# Altium PCB Analog_project.PcbDoc
Units mm, origin at the board's own origin, x right, y up, seen from the top; angles counter-clockwise.
Board outline 85 x 55 mm, 4 copper layers (Top Layer, Layer 1, Layer 2, Bottom Layer), stack 1.483 mm thick; 39 components, 28 nets, 155 pads, 46 vias.
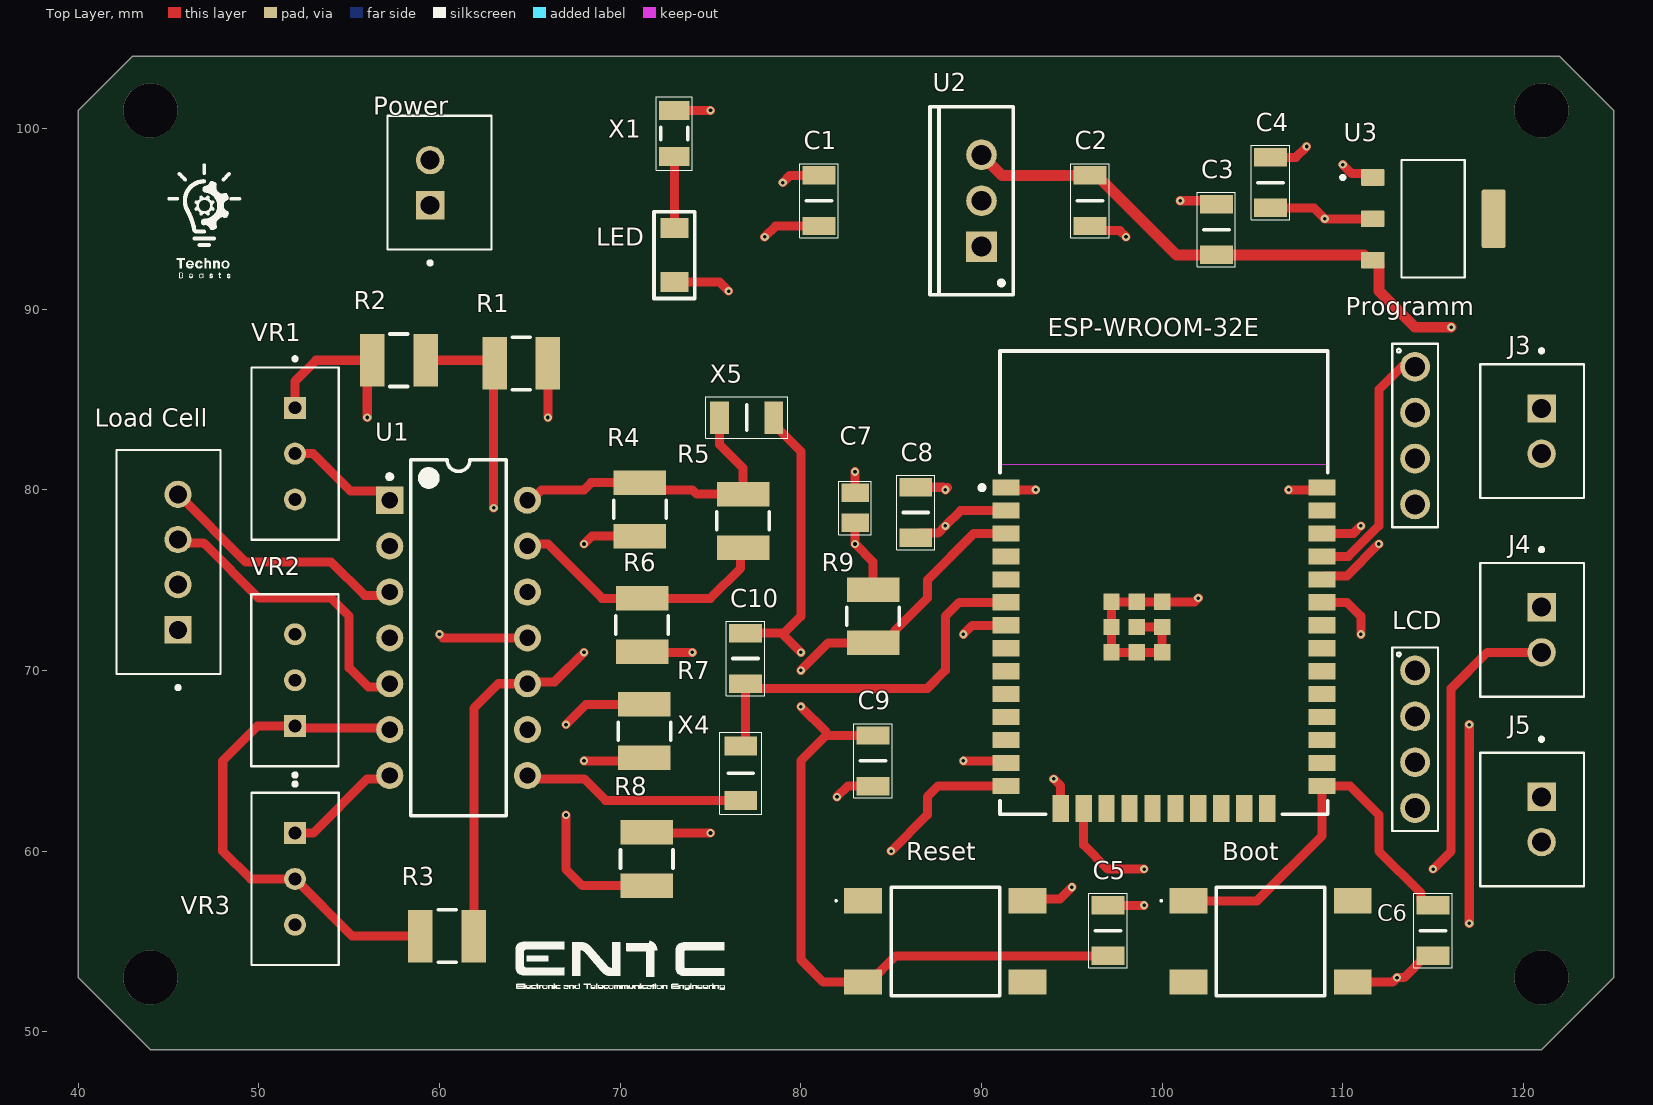
[diagram p0: Top Layer view]
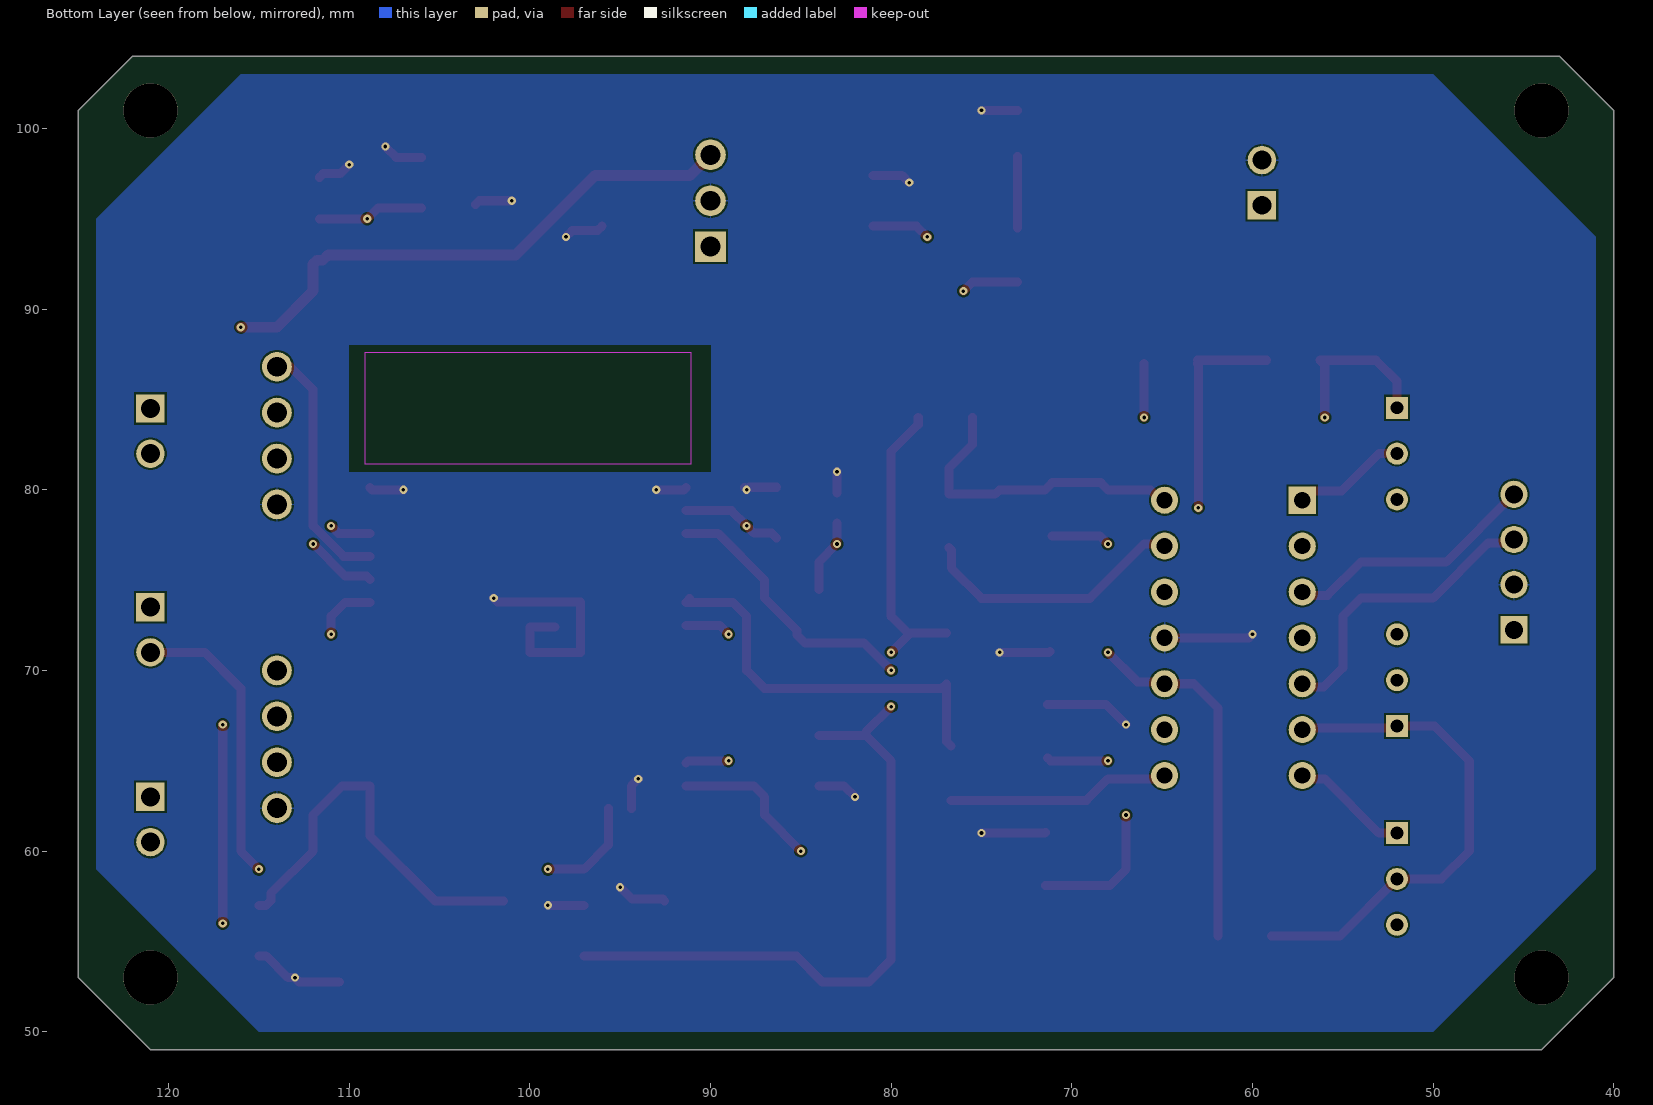
[diagram p1: Bottom Layer view, seen from below]
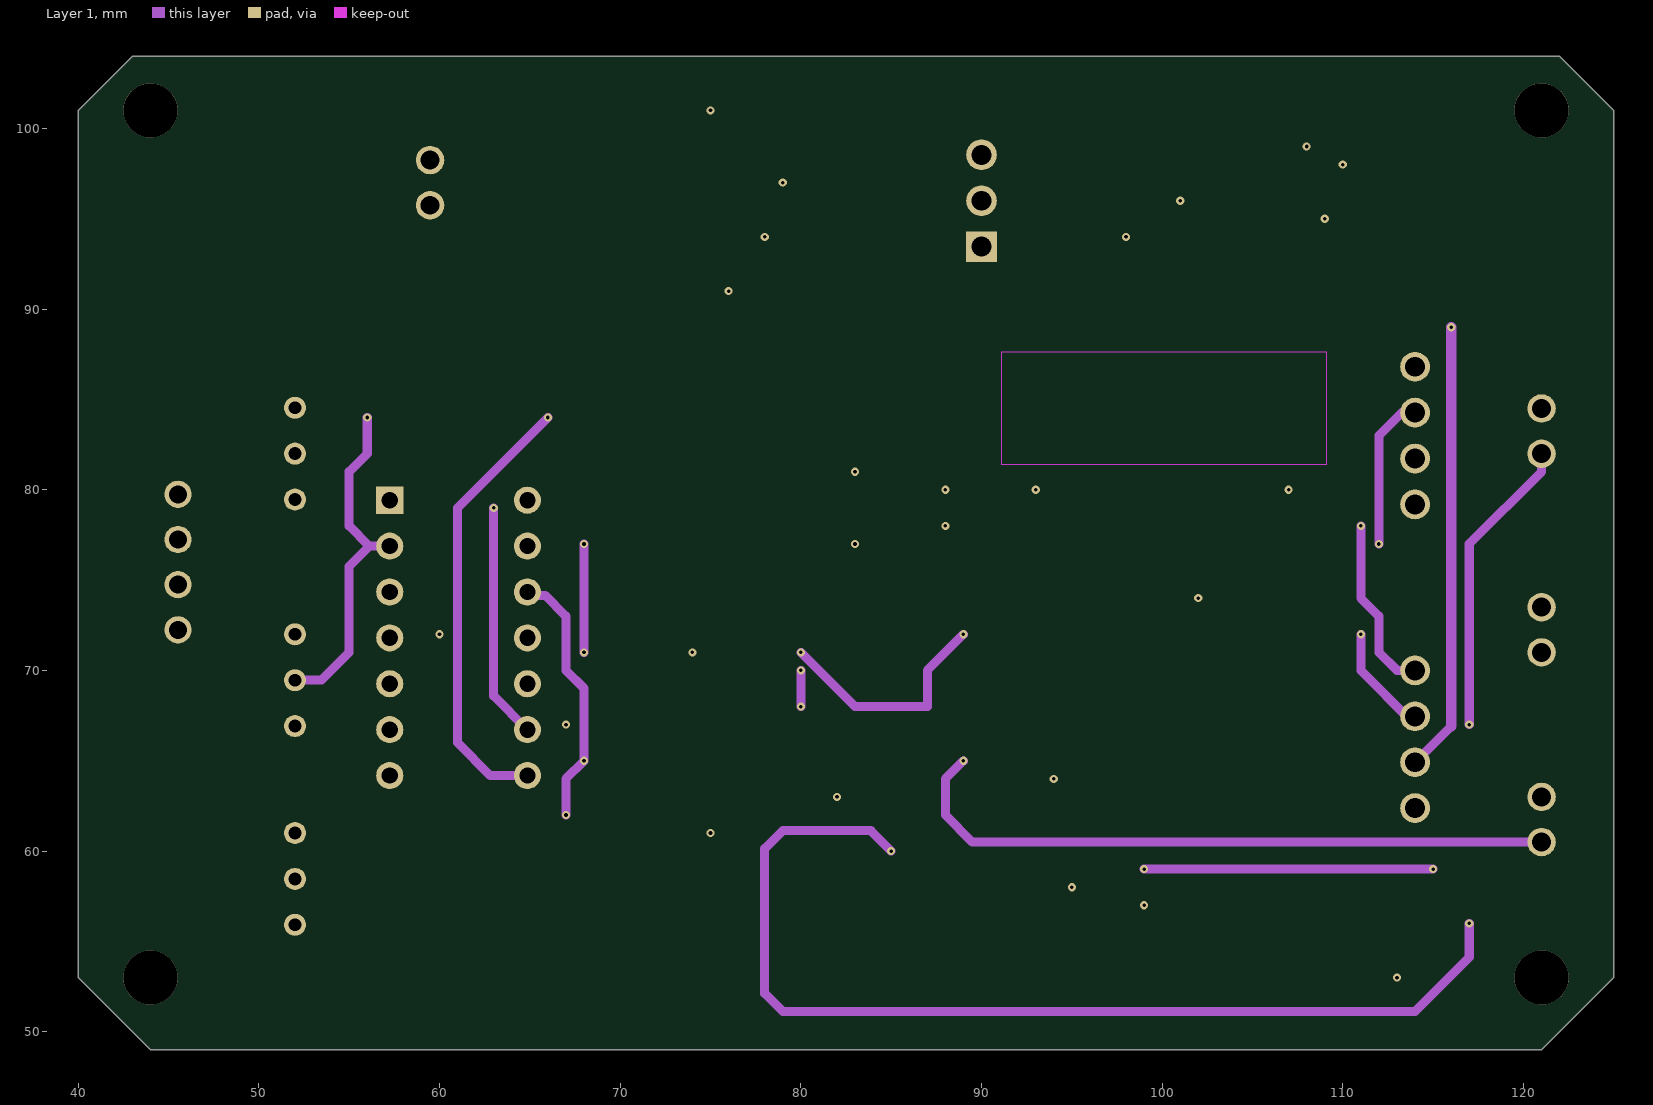
[diagram p2: Layer 1]
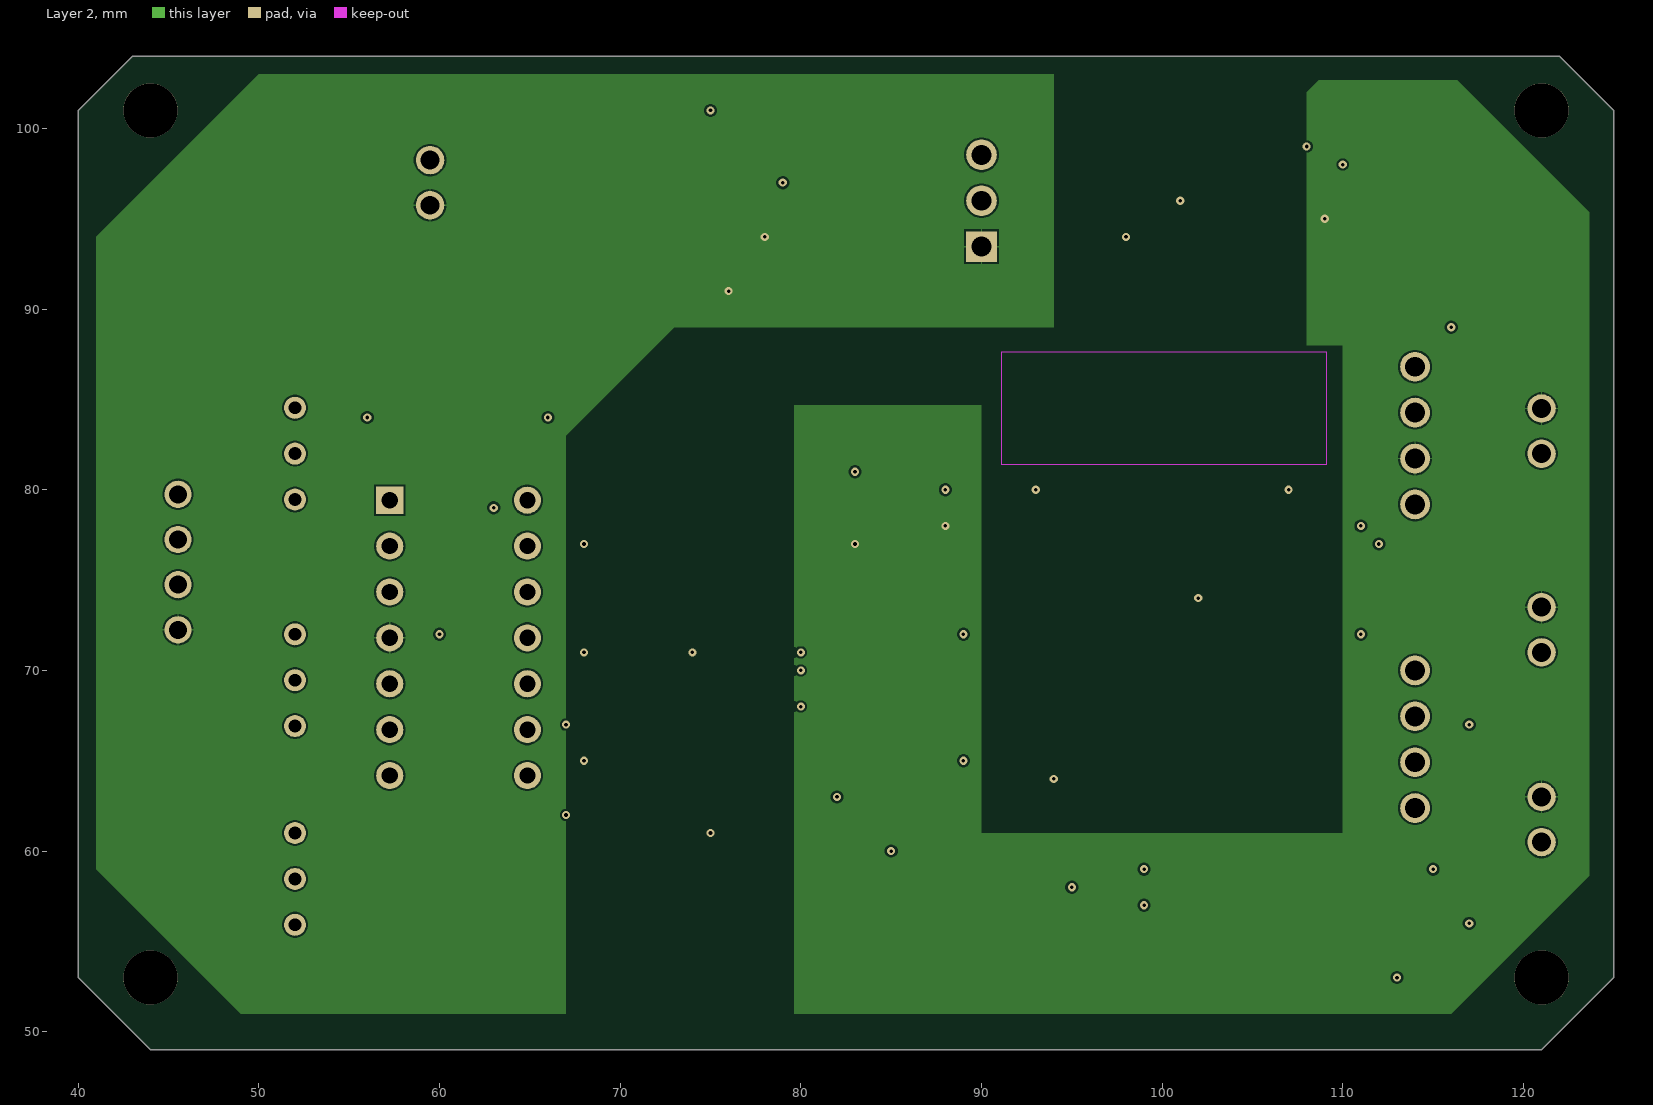
[diagram p3: Layer 2]
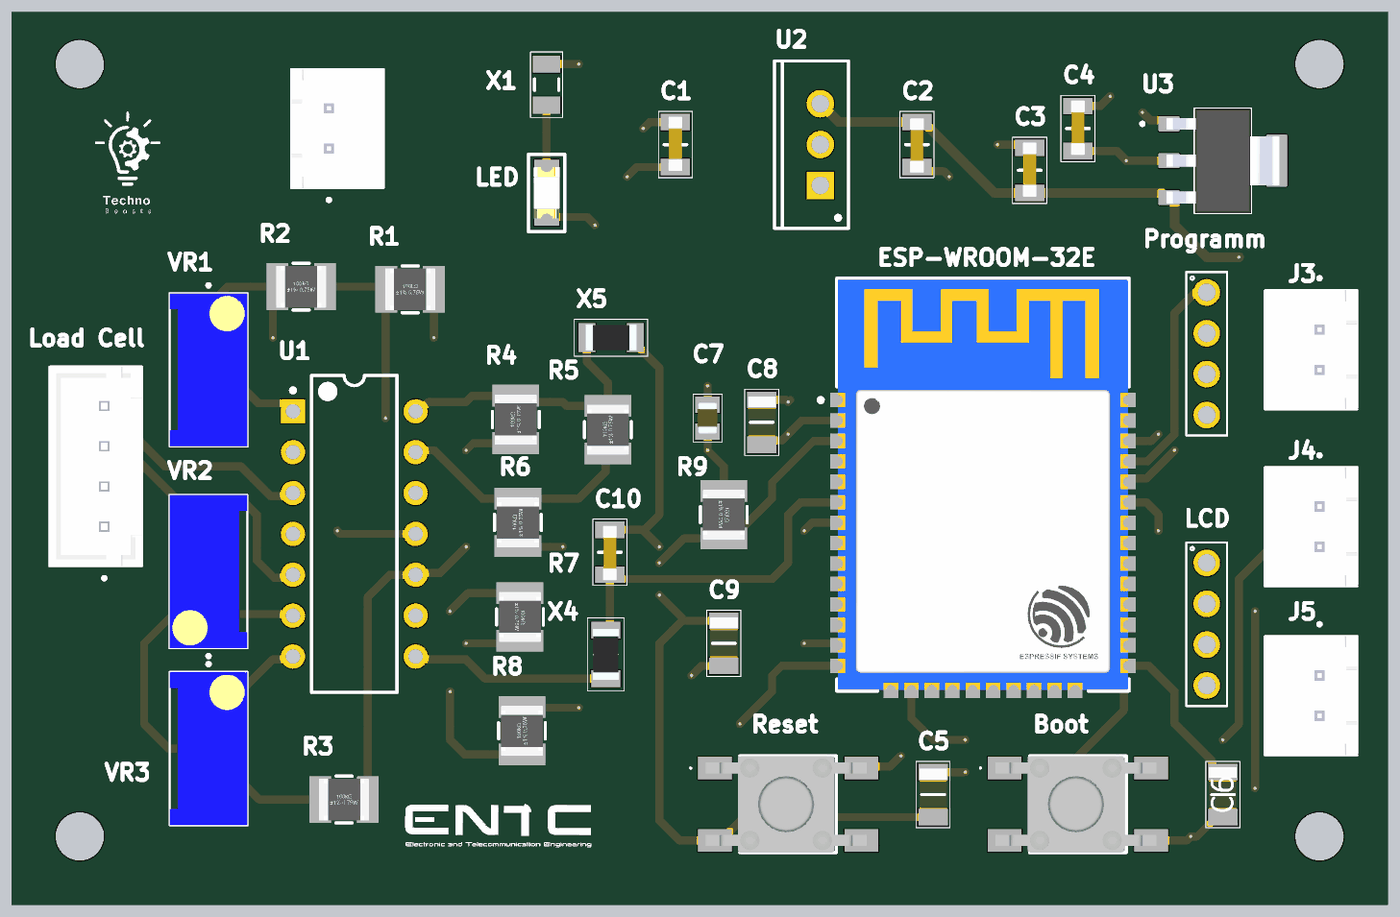
[diagram p4: 3D render of the assembled board from above, using the file's embedded part models]

## Layer stack, top to bottom
Top Solder: solder mask 0.0102, Solder Resist, Dk 3.5
Top Layer: signal copper 0.0356
Dielectric 2: prepreg 0.0711, PP-006, Dk 4.29
Layer 1: signal copper 0.035
Dielectric 1: dielectric 1.2, FR-4, Dk 4.8
Layer 2: signal copper 0.035
Dielectric 3: prepreg 0.0711, PP-006, Dk 4.29
Bottom Layer: signal copper 0.0356
Bottom Solder: solder mask 0.0102, Solder Resist, Dk 3.5

## Board outline
40,53 40,101 43,104 122,104 125,101 125,53 122.125,50.125 121,49 44,49

## Design rules (kind name [scope] priority, off if disabled: settings)
BoardOutlineClearance [All] p1: gap=0.2 ignorepadtopadclearanceinfootprint=FALSE
Clearance [All] p1: gap=0.102 ignorepadtopadclearanceinfootprint=FALSE except(0.127: Arc-Via Track-Via SMDPad-Via THPad-Via Via-Via Via-Fill Via-Poly Via-Region Via-Text; 0.25: Arc-Hole Track-Hole SMDPad-Hole THPad-Hole Via-Hole Fill-Hole Poly-Hole Region-Hole Text-Hole)
ComponentClearance [All] p1: gap=0.102 collisioncheckmode=3 verticalgap=0.102 showdistances=TRUE
DiffPairsRouting [All] p1: maxlimit=0.102 minlimit=0.102 mostfreqgap=0.102 toplayer_minwidth=0.102 toplayer_maxwidth=1816.048 toplayer_prefwidth=0.102 midlayer1_minwidth=0.102 midlayer1_maxwidth=1816.048 midlayer1_prefwidth=0.102 midlayer2_minwidth=0.102 midlayer2_maxwidth=1816.048 midlayer2_prefwidth=0.102 bottomlayer_minwidth=0.102 bottomlayer_maxwidth=1816.048 bottomlayer_prefwidth=0.102 maxuncoupledlength=12.7
Height [All] p1: minheight=0 maxheight=1816.048 prefheight=12.7
HoleSize [All] p1: absolutevalues=TRUE maxlimit=6.3 minlimit=0.2 maxpercent=80.000 minpercent=20.000
HoleToHoleClearance [All] p1: gap=0.25 allowstackedmicrovias=FALSE
MinimumAnnularRing [All] p1: minimumring=0.076
MinimumSolderMaskSliver [All] p1: minsoldermaskwidth=0
PlaneClearance [All] p1: clearance=0.102
PlaneConnect PlaneConnectPowerPads [InPadClass('PowerPads')] p1: planeconnectstyle=Direct reliefexpansion=0.508 reliefentries=4 reliefconductorwidth=0.254 reliefairgap=0.254
PlaneConnect [All] p2: pad.planeconnectstyle=Relief pad.reliefexpansion=0.3 pad.reliefentries=4 pad.reliefconductorwidth=0.102 pad.reliefairgap=0.102 via.planeconnectstyle=Direct via.reliefexpansion=0.3 via.reliefentries=4 via.reliefconductorwidth=0.127 via.reliefairgap=0.127
PolygonConnect PolygonConnectPowerPads [All vs (InPadClass('PowerPads'))] p1: connectstyle=Direct reliefconductorwidth=0.254 reliefentries=4 polygonreliefangle="90 Angle" airgapwidth=0.254
PolygonConnect [All] p2: thpad.connectstyle=Relief thpad.reliefconductorwidth=0.102 thpad.reliefentries=4 thpad.polygonreliefangle="90 Angle" thpad.airgapwidth=0.102 smdpad.connectstyle=Relief smdpad.reliefconductorwidth=0.102 smdpad.reliefentries=4 smdpad.polygonreliefangle="90 Angle" smdpad.airgapwidth=0.102 via.connectstyle=Direct via.reliefconductorwidth=0.127 via.reliefentries=4 via.polygonreliefangle="90 Angle" via.airgapwidth=0.127
RoutingVias [All] p1: holewidth=0.2 width=0.45 viastyle="Through Hole" minholewidth=0.2 minwidth=0.45 maxholewidth=6.3 maxwidth=6.55
SilkToSilkClearance [All] p1: silktosilkclearance=0
SilkToSolderMaskClearance [IsPad] p1: minsilkscreentomaskgap=0.102 clearancetoexposedcopper=TRUE
SolderMaskExpansion [All] p1: expansion=0.075 istentingtop=FALSE
Width [All] p1: maxlimit=1816.048 minlimit=0.102 preferedwidth=0.102
20 further rules are at their usual default settings.

## Components (designator, comment, footprint, x,y, rotation, side; value= is the part's Value field where it differs from the comment)
Boot "TS04-66-65-BK-160-SMT" TS046665BK160SMT 106,55 r0 top (schematic designator X3)
C1 "C1206C106K8RAC" CAPC3216X180N 81,96 r90 top
C2 "C1206C106K8RAC" CAPC3216X180N 96,96 r270 top
C3 "C1206C106K8RAC" CAPC3216X180N 103,94.4 r90 top
C4 "C1206C106K8RAC" CAPC3216X180N 106,97 r90 top
C5 "C1206C104K5RAC7867" CAPC3216X110N 97,55.6 r90 top
C6 "C1206C104K5RAC7867" CAPC3216X110N 115,55.6 r270 top
C7 "CL31B226KPKVPJE" CAPC2012X150N 83,79 r90 top
C8 "C1206C104K5RAC7867" CAPC3216X110N 86.36,78.74 r90 top
C9 "C1206C104K5RAC7867" CAPC3216X110N 84,65 r90 top
C10 "C1206C106K8RAC" CAPC3216X180N 76.929,70.66 r270 top
ESP-WROOM-32E "ESP32-WROOM-32E (16MB)" FP-ESP32-WROOM-32E_16MB-MFG 100.1,74.86 r0 top
J3 "B2B-XH-A(LF)(SN)" JST_B2B-XH-A(LF)(SN) 120.475,83.25 r90 top
J4 "B2B-XH-A(LF)(SN)" JST_B2B-XH-A(LF)(SN) 120.475,72.25 r90 top
J5 "B2B-XH-A(LF)(SN)" JST_B2B-XH-A(LF)(SN) 120.475,61.75 r90 top
LCD "61300411121" 61300411121 114,66.19 r270 top
LED "150120GS75000" LEDC3214X78N 73,93 r270 top (schematic designator D1)
"Load Cell" "B4B-XH-A(LF)(SN)" JST_B4B-XH-A(LF)(SN) 45,76 r90 top
Power "B2B-XH-A(LF)(SN)" JST_B2B-XH-A(LF)(SN) 60,97 r270 top
Programm "61300411121" 61300411121 114,83 r270 top
R1 "CRGP1210F10K" FP-CRGP1210-IPC_A 64.523,87 r0 top value=10KΩ
R2 "CRGP1210F10K" FP-CRGP1210-IPC_A 57.752,87.17 r0 top value=10KΩ
R3 "CRGP1210F10K" FP-CRGP1210-IPC_A 60.419,55.293 r0 top value=10KΩ
R4 "CRGP1210F10K" FP-CRGP1210-IPC_A 71.087,78.915 r90 top value=10KΩ
R5 "CRGP1210F10K" FP-CRGP1210-IPC_A 76.802,78.28 r90 top value=10KΩ
R6 "CRGP1210F10K" FP-CRGP1210-IPC_A 71.214,72.518 r90 top value=10KΩ
R7 "CRGP1210F10K" FP-CRGP1210-IPC_A 71.341,66.643 r270 top value=10KΩ
R8 "CRGP1210F10K" FP-CRGP1210-IPC_A 71.468,59.564 r90 top value=10KΩ
R9 "CRGP1210F10K" FP-CRGP1210-IPC_A 84,73 r270 top value=10KΩ
Reset "TS04-66-65-BK-160-SMT" TS046665BK160SMT 88,55 r0 top (schematic designator X2)
U1 "LM324N" N0014A 61.054,71.803 r0 top
U2 "L7805ACV" TO220 90,96 r90 top
U3 "AMS1117-3.3" SOT229P700X180-4N 115,95 r0 top
VR1 "3296W-OT1-103" TRIM_3296W-OT1-103 52,82 r270 top value=100kΩ
VR2 "3296W-OT1-103" TRIM_3296W-OT1-103 52,69.46 r90 top value=1kΩ
VR3 "3296W-OT1-103" TRIM_3296W-OT1-103 52,58.46 r270 top value=100kΩ
X1 "CHP1206AFX-2001ELF" RESC3116X65X50LL20T20 73,99.725 r270 top
X4 "RCC1206220RFKEA" RESC3216X60N 76.675,64.31 r90 top
X5 "RCC1206220RFKEA" RESC3216X60N 77,84 r0 top

## Footprints (in the part's own frame and the unit in brackets; to place one, negate y for a bottom-side part, rotate by r counter-clockwise, add the part's x,y. Pads: shape width x height; smd on the part's side, far side on the other; paste and mask are expansions set on the pad)
61300411121 [mm]
  round 1.65 hole 1.1: 1(-3.81,0) 2(-1.27,0) 3(1.27,0) 4(3.81,0)
  silkscreen extent -5.08,-1.27 5.08,1.27
CAPC2012X150N [mm]
  rect 1.01x1.52 smd: 1(-0.83,0) 2(0.83,0)
  silkscreen extent -1.49,-0.91 1.49,0.91, body extent -1,-0.63 1,0.63, height 1.5
CAPC3216X110N [mm]
  rect 1.02x1.82 smd: 1(-1.4,0) 2(1.4,0)
  silkscreen extent -2.06,-1.06 2.06,1.06, body extent -1.75,-0.91 1.65,0.89
CAPC3216X180N [mm]
  rect 1.02x1.82 smd: 1(-1.4,0) 2(1.4,0)
  silkscreen extent -2.06,-1.06 2.06,1.06, body extent -1.65,-0.44 1.75,0.44
FP-CRGP1210-IPC_A [mm]
  rect 1.358x2.906 smd paste+0 mask+0: 1(-1.477,0) 2(1.477,0)
  silkscreen extent -0.5,-1.45 0.5,1.45, body extent -2.66,-1.95 2.66,1.95, height 0.25
FP-ESP32-WROOM-32E_16MB-MFG [mm]
  rect 1.5x0.9 smd paste+0 mask+0: 1(-8.75,5.26) 2(-8.75,3.99) 3(-8.75,2.72) 4(-8.75,1.45) 5(-8.75,0.18) 6(-8.75,-1.09) 7(-8.75,-2.36) 8(-8.75,-3.63) 9(-8.75,-4.9) 10(-8.75,-6.17) 11(-8.75,-7.44) 12(-8.75,-8.71) 13(-8.75,-9.98) 14(-8.75,-11.25) 25(8.75,-11.25) 26(8.75,-9.98) 27(8.75,-8.71) 28(8.75,-7.44) 29(8.75,-6.17) 30(8.75,-4.9) 31(8.75,-3.63) 32(8.75,-2.36) 33(8.75,-1.09) 34(8.75,0.18) 35(8.75,1.45) 36(8.75,2.72) 37(8.75,3.99) 38(8.75,5.26)
  rect 0.9x1.5 smd paste+0 mask+0: 15(-5.715,-12.5) 16(-4.445,-12.5) 17(-3.175,-12.5) 18(-1.905,-12.5) 19(-0.635,-12.5) 20(0.635,-12.5) 21(1.905,-12.5) 22(3.175,-12.5) 23(4.445,-12.5) 24(5.715,-12.5)
  rect 0.9x0.9 smd paste+0 mask+0: 39(-2.9,-3.86) 39(-2.9,-2.46) 39(-2.9,-1.06) 39(-1.5,-3.86) 39(-1.5,-2.46) 39(-1.5,-1.06) 39(-0.1,-3.86) 39(-0.1,-2.46) 39(-0.1,-1.06)
  Keep-Out Layer region: -9,6.56 9,6.56 9,12.75 -9,12.75
  silkscreen extent -10.2,-12.83 9.08,12.83, body extent -9.6,-13.35 9.6,12.93, height 0.25
JST_B2B-XH-A(LF)(SN) [mm]
  rect 1.575x1.575 / inner round 1.575 / far side rect 1.575x1.575 hole 1.05: 1(1.25,-0.525)
  round 1.575 hole 1.05: 2(-1.25,-0.525)
  silkscreen extent -3.7,-2.88 4.54,2.88, body extent -3.7,-2.88 3.7,2.88, height 7
JST_B4B-XH-A(LF)(SN) [mm]
  rect 1.508x1.508 / inner round 1.508 / far side rect 1.508x1.508 hole 1: 1(-3.75,-0.525)
  round 1.508 hole 1: 2(-1.25,-0.525) 3(1.25,-0.525) 4(3.75,-0.525)
  silkscreen extent -7.05,-2.88 6.2,2.88, body extent -6.2,-2.88 6.2,2.88, height 7
LEDC3214X78N [mm]
  rect 1.1x1.55 smd: 1(-1.5,0) 2(1.5,0)
  silkscreen extent -2.4,-1.12 2.41,1.12, body extent -1.6,-0.8 1.6,0.8, height 0.68
N0014A [mm] "DIP, 14-Leads, Body 19.7x6.6mm, Pitch 2.54mm"
  rect 1.5x1.5 hole 0.9: 1(-3.81,7.62)
  round 1.5 hole 0.9: 2(-3.81,5.08) 3(-3.81,2.54) 4(-3.81,0) 5(-3.81,-2.54) 6(-3.81,-5.08) 7(-3.81,-7.62) 8(3.81,-7.62) 9(3.81,-5.08) 10(3.81,-2.54) 11(3.81,0) 12(3.81,2.54) 13(3.81,5.08) 14(3.81,7.62)
  silkscreen extent -3.93,-9.85 2.65,9.85, body extent -3.95,-9.85 3.95,9.85, height 5.08
RESC3116X65X50LL20T20 [mm] "Chip Resistor, 2-Leads, Body 3.10x1.60mm, IPC High Density"
  rect 1.05x1.7 smd: 1(-1.275,0) 2(1.275,0)
  silkscreen extent -2.03,-1 2.03,1, body extent -1.65,-0.9 1.65,0.9, height 0.65
RESC3216X60N [mm]
  rect 1.05x1.8 smd: 1(-1.5,0) 2(1.5,0)
  silkscreen extent -2.27,-1.15 2.27,1.15, body extent -1.58,-0.8 1.58,0.8, height 0.6
SOT229P700X180-4N [mm]
  rrect15% 1.31x0.93 smd: 1(-3.345,2.29) 2(-3.345,0) 3(-3.345,-2.29)
  rrect15% 1.31x3.24 smd: 4(3.345,0)
  silkscreen extent -5.1,-3.25 1.75,3.25, body extent -3.5,-3.25 3.5,3.25, height 1.8
TO220 [mm] "TO, Thru-Hole, Vertical, Heatsink Mounted; 3 In-Line Leads; Pitch 2.54 mm"
  rect 1.7x1.7 hole 1.1: 1(-2.54,0)
  round 1.7 hole 1.1: 2(0,0) 3(2.54,0)
  silkscreen extent -5.2,-1.75 5.2,2.85, body extent -5.25,-1.8 5.25,2.9, height 19.7
TRIM_3296W-OT1-103 [mm]
  rect 1.218x1.218 / inner round 1.218 / far side rect 1.218x1.218 hole 0.71: 1(-2.54,0)
  round 1.218 hole 0.71: 2(0,0) 3(2.54,0)
  silkscreen extent -5.35,-2.41 4.76,2.42, body extent -4.76,-2.41 4.76,2.42, height 11.55
TS046665BK160SMT [mm]
  rect 2.1x1.4 smd: 1(-4.55,2.25) 2(-4.55,-2.25) 3(4.55,2.25) 4(4.55,-2.25)
  silkscreen extent -6.1,-3 3,3, body extent -5.13,-3 4.87,3, height 6.61

## Part data
Boot Reset: "Tactile Switches 6 x 6 mm, 6.5 mm Act Height, 160 gf, Black, Surface Mount, SPST,", Manufacturer_Name="CUI Devices", Mouser Part Number=179-TS046665BK160SMT, Datasheet Link=https://www.cuidevices.com/product/resource/ts04.pdf, Geometry.Height=6.7mm, Manufacturer_Part_Number=TS04-66-65-BK-160-SMT, Mouser Price/Stock=https://www.mouser.co.uk/ProductDetail/CUI-Devices/TS04-66-65-BK-160-SMT?qs=A6eO%252BMLsxmTgRLoTHWtDYQ%3D%3D
C1 C2 C3 C4 C10: "Multilayer Ceramic Capacitors MLCC - SMD/SMT 10V 10uF X7R 1206 0.1", Capacitance=10uF, Manufacturer_Name=KEMET, Mouser Part Number=80-C1206C106K8RAC, Datasheet Link=https://www.mouser.in/datasheet/2/212/KEM_C1002_X7R_SMD-1102033.pdf, Geometry.Height=1.8mm, Manufacturer_Part_Number=C1206C106K8RAC, Mouser Price/Stock=https://www.mouser.co.uk/ProductDetail/KEMET/C1206C106K8RAC?qs=IIhARexJuViDIgySPNv42g%3D%3D
C5 C6 C8 C9: "Multilayer Ceramic Capacitors MLCC - SMD/SMT 50V 0.1uF X7R 1206 10%", Capacitance=0.1uF, Manufacturer_Name=KEMET, Mouser Part Number=80-C1206104K5RAC7867, Datasheet Link=https://content.kemet.com/datasheets/KEM_C1002_X7R_SMD.pdf, Geometry.Height=1.1mm, Manufacturer_Part_Number=C1206C104K5RAC7867, Mouser Price/Stock=https://www.mouser.co.uk/ProductDetail/KEMET/C1206C104K5RAC7867?qs=r%2FVmNO8Tjq5MvP%2FjoJQjcw%3D%3D
C7: "General Multilayer Ceramic Capacitors", Capacitamce=22uF, Manufacturer_Name=SAMSUNG, Mouser Part Number=187-CL31B226KPKVPJE, Geometry.Height=1.5mm, Manufacturer_Part_Number=CL31B226KPKVPJE, Mouser Price/Stock=https://www.mouser.co.uk/ProductDetail/Samsung-Electro-Mechanics/CL31B226KPKVPJE?qs=Jm2GQyTW%2Fbh6Hm6JEZyOWg%3D%3D
ESP-WROOM-32E: library part CMP-194065-000027-1, "RX TXRX MOD WIFI TRACE ANT SMD"
J3 J4 J5 Power: "Connector Header Through Hole 2 position 0.098 (2.50mm)", Package=None, Check_prices=https://www.snapeda.com/parts/B2B-XH-A(LF)(SN)/JST+Sales+America+Inc./view-part/?ref=eda, MF="JST Sales America Inc.", MP=B2B-XH-A(LF)(SN), SnapEDA_Link=https://www.snapeda.com/parts/B2B-XH-A(LF)(SN)/JST+Sales+America+Inc./view-part/?ref=snap
LCD Programm: "Board Connector, 4 Contact(s), 1 Row(s), Male, Straight, 0.1 inch Pitch, Solder Terminal, Locking, Black Insulator, Plug", Contact Resistance=20mR, Dielectric Withstanding Voltage (AC)=500V, Insulation Color=Black, Insulation Resistance=1GR, Manufacturer="Wurth Electronics", Max Operating Temperature=125°C, Min Operating Temperature=-40°C, Rated Current (Signal)=3A, Supplier Part Number=732-5317-ND, Body Breadth=0.1inch, Body Depth=0.1inch, Body Length=0.4inch, Body/Shell Style=PLUG, Category="Headers and Wire Housings", ComponentLink1Description=https://datasheet.ciiva.com:443/pdfs/VipMasterIC/IC/MIDC/MIDCS07676/MIDCS07676-1.pdf?src-supplier=IHS+Markit, ComponentLink1URL=https://datasheet.ciiva.com:443/pdfs/VipMasterIC/IC/MIDC/MIDCS07676/MIDCS07676-1.pdf?src-supplier=IHS+Markit, ComponentLink2Description=http://www.farnell.com/cad/1737268.pdf?src-supplier=Element14, ComponentLink2URL=http://www.farnell.com/cad/1737268.pdf?src-supplier=Element14, ComponentLink3Description=https://katalog.we-online.de/em/datasheet/6130xx11121.pdf?src-supplier=Digi-Key, ComponentLink3URL=https://katalog.we-online.de/em/datasheet/6130xx11121.pdf?src-supplier=Digi-Key, Connector Type="BOARD CONNECTOR", Contact Finish - Mating=GOLD, Contact Finish - Termination="Gold (Au) - with Nickel (Ni) barrier", Contact Gender=Male, Contact Material="Copper Alloy", Contact Pattern=RECTANGULAR, Contact Style="SQ PIN-SKT", Insulation Material=Polybutylene, JESD-609 Code=e4, Manufacturer Part Number=61300411121, Mating Contact Pitch=0.1inch, Mounting Option 1=LOCKING, Mounting Style=STRAIGHT, Mounting Technology=Board, Number Of Connectors=1, Number of Contacts=4, Number of Rows Loaded=1, PCB Contact Pattern=RECTANGULAR, Pricing="1=0.19, 10=0.163, 25=0.1352, 50=0.113, 100=0.102, 1000=0.094 (USD)", Reach SVHC Compliant=Yes, Reference Standard=UL, Reliability=COMMERCIAL, RoHS=Yes, RoHS Compliant=Yes, Stock=103058, Supplier=Digi-Key, Terminal Length=0.118inch, Terminal Pitch=2.54mm, Termination=Solder
LED: "LED,Wurth Elektronik,150120GS75000 Wurth Elektronik 150120GS75000, WL-SMCW Series Green LED, 520 nm, 3016 (1206) Clear, Rectangle Lens SMD Package", Manufacturer_Name="Wurth Elektronik", Mouser Part Number=710-150120GS75000, Geometry.Height=0.78mm, Manufacturer_Part_Number=150120GS75000, Mouser Price/Stock=https://www.mouser.co.uk/ProductDetail/Wurth-Elektronik/150120GS75000?qs=LlUlMxKIyB3I3AMxrmBw4A%3D%3D
"Load Cell": "Connector Header Through Hole 4 position 0.098 (2.50mm)", Package=None, Availability="In Stock", Check_prices=https://www.snapeda.com/parts/B4B-XH-A(LF)(SN)/JST+Sales+America+Inc./view-part/?ref=eda, MF="JST Sales", MP=B4B-XH-A(LF)(SN), Price=None, Purchase-URL=https://pricing.snapeda.com/search/part/B4B-XH-A(LF)(SN)/?ref=eda, SnapEDA_Link=https://www.snapeda.com/parts/B4B-XH-A(LF)(SN)/JST+Sales+America+Inc./view-part/?ref=snap
R1 R2 R3 R4 R5 R6 R7 R8 R9: library part CMP-03211-008532-1, "CRGP1210 10KΩ 0.75W ±100ppm/°C 1% 200V", Manufacturer=TE, Package=CRGP1210, Power Rating=0.75W, Resistance=10KΩ, Temperature="-55°C to +155°C", Temperature Coefficient=±100ppm/°C, Temperature Range High=+155°C, Temperature Range Low=-55°C, Tolerance=0.01, Voltage Rating=200V, Automotive=No, Category=Res, ComponentLink2Description=Datasheet, ComponentLink2URL=https://www.te.com/commerce/DocumentDelivery/DDEController?Action=srchrtrv&DocNm=9-1773463-9&DocType=Data+Sheet&DocLang=English&DocFormat=pdf&PartCntxt=4-2176329-922, Composition="Thick Film", Device Class L1="Passive Components", Device Class L2=Resistors, Device Class L3="Chip SMD Resistors", Height=0.65mm, Ipc Land Pattern Name=RESC310260X55, Lead Free=Yes, Manufacturer Part Number=CRGP1210F10K, Octopart=https://octopart.com/crgp1210f10k-te+connectivity-91018904, RoHS=TRUE, Series=CRGP
U1: library part CMP-0055-00082-3, "Low Power Quad Operational Amplifier, 14-pin MDIP", Manufacturer="Texas Instruments", Package Reference=N0014A, PackageTopMarking=NSUZXYYTTE#*LM324N, PowerWise=N, Code_JEDEC=MS-001-AA, ComponentLink1Description="Datasheet URL", ComponentLink1URL=http://www.ti.com/general/docs/lit/getliterature.tsp?genericPartNumber=LM324&fileType=pdf, CompType=Amplifiers, PackageDescription="MDIP, .750 x .250 x.130in, 14 Lead, .100in Pitch", PinCount=14, RoHS=N
U2: library part CMP-0244-00484-1, "Positive Voltage Regulator, 5V, 3-Pin TO-220", ComponentLink1Description="Manufacturer URL", ComponentLink1URL=http://www.st.com, ComponentLink2Description=Datasheet, ComponentLink2URL=http://www.st.com/internet/com/TECHNICAL_RESOURCES/TECHNICAL_LITERATURE/DATASHEET/CD00000444.pdf, ComponentLink3Description="Package Specification", ComponentLink3URL=http://www.st.com/internet/com/TECHNICAL_RESOURCES/TECHNICAL_LITERATURE/PACKAGE_INFORMATION/CD00004649.pdf, DatasheetVersion=16/11/2011, PackageDescription="TO, Thru-Hole, Vertical, Heatsink Mounted; 3 In-Line Leads; Pitch 2.54 mm", PackageReference=TO220, PackageVersion=ver3.0
U3: "Sot223/Pkg 1-Amp 3.3-Volt Low Drop Out Voltage Regulatator", Package="SOT-223 Seeed Technology", Availability="Not in stock", Check_prices=https://www.snapeda.com/parts/AMS1117-3.3/Advanced+Monolithic+Systems/view-part/?ref=eda, MF="Advanced Monolithic Systems", MP=AMS1117-3.3, Price=None, SnapEDA_Link=https://www.snapeda.com/parts/AMS1117-3.3/Advanced+Monolithic+Systems/view-part/?ref=snap
VR1 VR2 VR3: "Potentiometers, multi, Resistors, trimmer, cermet, potentiometers, turn, sealed, Potentiometers and Accessories, Pass...", Package="SOT-23-5 Bourns", Availability="Not in stock", Check_prices=https://www.snapeda.com/parts/3296W-OT1-103/Bourns/view-part/?ref=eda, MF=Bourns, MP=3296W-OT1-103, Price=None, SnapEDA_Link=https://www.snapeda.com/parts/3296W-OT1-103/Bourns/view-part/?ref=snap
X1: "Thick Film Resistors - SMD ResHighPowerA 1206 2k 1% 3/4W TC100 AEC-Q200", Manufacturer_Name=Bourns, Mouser Part Number=652-CHP1206AFX-2001L, Resistance=2k, Datasheet Link=https://www.mouser.mx/datasheet/2/54/chp-a-1858677.pdf, Geometry.Height=0.65mm, Manufacturer_Part_Number=CHP1206AFX-2001ELF, Mouser Price/Stock=https://www.mouser.co.uk/ProductDetail/Bourns/CHP1206AFX-2001ELF?qs=GedFDFLaBXERFI3Dnxqg6Q%3D%3D
X4 X5: "Thick Film Resistors - SMD 220ohms 1% 100ppm", Manufacturer_Name=Vishay, Mouser Part Number=71-RCC1206220RFKEA, Resistance=220Ω, Datasheet Link=https://4donline.ihs.com/images/VipMasterIC/IC/VISH/VISH-S-A0011718072/VISH-S-A0011718072-1.pdf?hkey=6D3A4C79FDBF58556ACFDE234799DDF0, Geometry.Height=0.6mm, Manufacturer_Part_Number=RCC1206220RFKEA, Mouser Price/Stock=https://www.mouser.co.uk/ProductDetail/Vishay-Dale/RCC1206220RFKEA?qs=IS%252B4QmGtzzrRn9QnSak10Q%3D%3D

## Free pads (board coordinates)
  round 3 hole 3 unplated: 29(44,101) 30(44,53) 31(121,53) 32(121,101)

## Via types
v1: diameter 0.45, hole 0.2, Top Layer to Bottom Layer, tented both sides, 46 vias

## Nets (pads, with @x,y where several pads share a name; then routed paths per layer and width w, separated by ;. In a path a pad name is that pad's centre, name@x,y a point inside that pad or via, vN(x,y) a via of type N, cw(c..) or ccw(c..) an arc to the next point about the centre after c; other vN are vias at no path point)
+3.3V: C4.1 C7.1 C8.1 ESP-WROOM-32E.2 J3.1 J4.1 J5.1 Programm.3 R9.1 U3.2 | length 15.6
  Top Layer w0.5: C7.1 v1(83,77) 84,76 R9.1 ; C8.1 86.62,77.6 87.6,77.6 v1(88,78) 88.85,78.85 ESP-WROOM-32E.2 ; C4.1 108.4,95.6 v1(109,95) U3.2
+5V: C2.1 C3.1 LCD.3 U2.3 U3.3 | length 55.7
  Top Layer w0.6: U2.3 91.14,97.4 C2.1 96.4,97.4 100.8,93 C3.1 111.175,93 111.465,92.71 U3.3 111.785,92.71 112,92.495 112,91 114,89 v1(116,89)
  Layer 1 w0.5: LCD.3 116,66.92
  Layer 1 w0.6: 116,66.92 v1(116,89)
+10V: "Load Cell.1" C1.1 LED.2 Power.1 U1.4 U2.1 | length 6.5
  Top Layer w0.5: LED.2 75.5,91.5 v1(76,91) ; v1(78,94) 78.6,94.6 C1.1
AmpOutput1: R1.2 U1.8 X4.1 | length 40.1
  Top Layer w0.5: U1.8 65.047,64 68,64 69.19,62.81 X4.1 ; v1(66,84) R1.2
  Layer 1 w0.5: U1.8 62.817,64.183 61,66 61,79 v1(66,84)
AmpOutput2: R4.2 R5.2 U1.14 X5.1 | length 17.4
  Top Layer w0.5: U1.14 65.08,79.423 65.657,80 68,80 68.392,80.392 R4.2 71.479,80 74,80 74.243,79.757 R5.2 76.802,81.198 75.5,82.5 X5.1
EN: C5.1 C9.2 ESP-WROOM-32E.3 R9.2 Reset.2 | length 53.1
  Top Layer w0.5: v1(80,68) 81.4,66.6 81.4,66.4 ; v1(80,70) 81.523,71.523 R9.2 84.774,71.523 85.203,71.952 85.203,72.203 87,74 87,75 89.58,77.58 ESP-WROOM-32E.3 ; C9.2 81.4,66.4 ; C5.1 85.25,54.2 83.8,52.75 Reset.2 81.25,52.75 80,54 80,65 81.4,66.4
  Layer 1 w0.5: v1(80,68) v1(80,70)
GND: "Load Cell.2" Boot.4 C1.2 C2.2 C3.2 C4.2 C5.2 C6.2 C7.2 C8.2 C9.1 ESP-WROOM-32E.1 ESP-WROOM-32E.15 ESP-WROOM-32E.38 ESP-WROOM-32E.39 LCD.4 Power.2 Programm.4 R6.1 R7.1 R8.2 Reset.3 U1.11 U2.2 U3.1 X1.1 | length 62.6
  Top Layer w0.5: v1(60,72) 60.197,71.803 U1.11 ; v1(67,67) 68.12,68.12 R7.1 ; R6.1 71.255,71 v1(74,71) ; R8.2 71.509,61 v1(75,61) ; X1.1 v1(75,101) ; v1(79,97) 79.4,97.4 C1.2 ; v1(82,63) 82.6,63.6 C9.1 ; C7.2 v1(83,81) ; C8.2 87.86,80.14 v1(88,80) v1@88.12,80.12 ; ESP-WROOM-32E.1 91.47,80 v1(93,80) ; Reset.3 92.65,57.35 94.35,57.35 v1(95,58) ; v1(94,64) 94.385,63.615 ESP-WROOM-32E.15 ; C2.2 96.26,94.34 97.66,94.34 v1(98,94) ; C5.2 v1(99,57) ; ESP-WROOM-32E.39@98.6,72.4 100,72.4 100,71 98.6,71 97.2,71 97.2,72.4 97.2,73.8 98.6,73.8 100,73.8 101.8,73.8 v1(102,74) ; v1(101,96) 102.8,96 C3.2 ; C4.2 107.4,98.4 v1(108,99) ; v1(107,80) 108.73,80 ESP-WROOM-32E.38 ; v1(110,98) 110.495,97.505 111.44,97.505 U3.1 ; Boot.4 112.75,52.75 v1(113,53) 113.4,53 114.6,54.2 C6.2
IO0: Boot.1 C6.1 ESP-WROOM-32E.25 | length 21.9
  Top Layer w0.5: Boot.1 105.25,57.25 108.85,60.85 ESP-WROOM-32E.25 110.39,63.61 112,62 112,60 114.34,57.66 114.34,57.26 114.6,57 C6.1
LC+: "Load Cell.3" U1.5 | length 16.9
  Top Layer w0.5: 45.525,77.25 45.718,77.057 46.943,77.057 47,77 50,74 54,74 55,73 55,70.143 56.072,69.072 57.053,69.072 U1.5
LC-: "Load Cell.4" U1.3 | length 14.1
  Top Layer w0.5: 45.525,79.75 49.275,76 54,76 55.848,74.152 56.451,74.152 57.053,74.152 U1.3
NetC10_1: C10.1 ESP-WROOM-32E.7 X5.2 | length 32.2
  Top Layer w0.5: C10.1 78.94,72.06 79,72 ; X5.2 78.5,83.625 80,82.125 80,73 79,72 ; v1(80,71) 79,72 ; v1(89,72) 89.5,72.5 ESP-WROOM-32E.7
  Layer 1 w0.5: v1(80,71) 83,68 87,68 87,70 v1(89,72)
NetC10_2: C10.2 ESP-WROOM-32E.6 X4.2 | length 22.1
  Top Layer w0.5: X4.2 76.929,66.064 C10.2 77.189,69 87,69 88,70 88,73 88.77,73.77 ESP-WROOM-32E.6 ESP-WROOM-32E.6@91.15,73.97
NetD1_1: LED.1 X1.2 | length 4
  Top Layer w0.5: LED.1 X1.2
NetR1_1: R1.1 R2.2 U1.9 | length 24.9
  Top Layer w0.5: R2.2 R1.1@63.046,87.17 ; v1(63,79) 63,86.954 R1.1
  Layer 1 w0.5: v1(63,79) 63,68.587 U1.9
NetR2_1: R2.1 U1.2 VR1.1 VR2.2 | length 28.8
  Top Layer w0.5: VR1.1 52,86 53.17,87.17 R2.1 56,86.895 v1(56,84)
  Layer 1 w0.5: VR2.2 53.46,69.46 55,71 55,75.766 56.117,76.883 ; v1(56,84) 56,82 55,81 55,78 56.117,76.883 ; U1.2@57.105,76.744 U1.2 56.117,76.883
NetR3_1: R3.1 U1.6 VR2.1 VR3.2 | length 28
  Top Layer w0.5: U1.6 57.145,66.822 52.098,66.822 VR2.1 49.92,66.92 48,65 48,60 49.54,58.46 VR3.2 55.167,55.293 R3.1
NetR3_2: R3.2 R4.1 U1.10 | length 29.3
  Top Layer w0.5: R3.2 61.896,67.896 63.263,69.263 U1.10 64.965,69.364 66.364,69.364 v1(68,71) ; v1(68,77) 68.438,77.438 R4.1
  Layer 1 w0.5: v1(68,71) v1(68,77)
NetR5_1: R5.1 R6.2 U1.13 | length 15
  Top Layer w0.5: U1.13 64.981,77 66,77 69.005,73.995 R6.2 74.995,73.995 76.667,75.667 76.667,76.668 R5.1
NetR7_2: R7.2 R8.1 U1.12 | length 25.8
  Top Layer w0.5: v1(67,62) 67,59 67.913,58.087 R8.1 ; v1(68,65) 71.175,65 R7.2
  Layer 1 w0.5: U1.12 65.055,74.152 65.848,74.152 67,73 67,70 68,69 v1(68,65) 67,64 v1(67,62)
NetU1_1: U1.1 VR1.2 | length 6.3
  Top Layer w0.5: VR1.2 53,82 55.077,79.923 56.744,79.923 U1.1
NetU1_7: U1.7 VR3.1 | length 6.6
  Top Layer w0.5: VR3.1 53,61 56,64 57.061,64 U1.7
PB1: ESP-WROOM-32E.14 J3.2 | length 94.5
  Top Layer w0.5: v1(85,60) 87,62 87,63 87.61,63.61 ESP-WROOM-32E.14 ; v1(117,56) v1(117,67)
  Layer 1 w0.5: v1(85,60) 83.871,61.129 79,61.129 78,60.129 78,52.129 79,51.129 114,51.129 117,54.129 v1(117,56) ; v1(117,67) 117,77 121,81 J3.2
PB2: ESP-WROOM-32E.16 J4.2 | length 38.2
  Top Layer w0.5: ESP-WROOM-32E.16 95.655,60.345 97,59 v1(99,59) ; v1(115,59) 116,60 116,69 118,71 J4.2
  Layer 1 w0.5: v1(99,59) v1(115,59)
PB3: ESP-WROOM-32E.13 J5.2 | length 39.4
  Top Layer w0.5: v1(89,65) 91.23,65 ESP-WROOM-32E.13
  Layer 1 w0.5: v1(89,65) 88,64 88,62 89.5,60.5 J5.2
RX: ESP-WROOM-32E.34 Programm.2 | length 12.5
  Top Layer w0.5: ESP-WROOM-32E.34 109.05,75.24 110.24,75.24 v1(112,77)
  Layer 1 w0.5: v1(112,77) 112,83 113.27,84.27 Programm.2
SCL: ESP-WROOM-32E.36 LCD.1 | length 12.2
  Top Layer w0.5: ESP-WROOM-32E.36 110.58,77.58 v1(111,78)
  Layer 1 w0.5: v1(111,78) 111,74 112,73 112,71 113,70 LCD.1
SDA: ESP-WROOM-32E.33 LCD.2 | length 9.4
  Top Layer w0.5: ESP-WROOM-32E.33 110.23,73.77 111,73 v1(111,72)
  Layer 1 w0.5: v1(111,72) 111,70 LCD.2@113.77,67.23
TX: ESP-WROOM-32E.35 Programm.1 | length 13.9
  Top Layer w0.5: ESP-WROOM-32E.35 110.31,76.31 112,78 112,85.54 113.27,86.81 Programm.1
pads on no net: Boot.2 Boot.3 ESP-WROOM-32E.4 ESP-WROOM-32E.5 ESP-WROOM-32E.8 ESP-WROOM-32E.9 ESP-WROOM-32E.10 ESP-WROOM-32E.11 ESP-WROOM-32E.12 ESP-WROOM-32E.17 ESP-WROOM-32E.18 ESP-WROOM-32E.19 ESP-WROOM-32E.20 ESP-WROOM-32E.21 ESP-WROOM-32E.22 ESP-WROOM-32E.23 ESP-WROOM-32E.24 ESP-WROOM-32E.26 ESP-WROOM-32E.27 ESP-WROOM-32E.28 ESP-WROOM-32E.29 ESP-WROOM-32E.30 ESP-WROOM-32E.31 ESP-WROOM-32E.32 ESP-WROOM-32E.37 Reset.1 Reset.4 U3.4 VR1.3 VR2.3 VR3.3

## Polygon pours and split planes (outlines as drawn)
+3.3V on Layer 2 "+3.3V_L03_P006" (solid, pour order 6): 110,102.673 116.327,102.673 123.642,95.358 123.642,58.642 116,51 79.642,51 79.642,84.673 90,84.673 90,61 110,61
+10V on Layer 2 "+10V_L03_P000" (solid, pour order 0): 58,103 50,103 41,94 41,82 41,59 49,51 67,51 67,83 73,89 94,89 94,103
+3.3V on Layer 2 "+3.3V_L03_P010" (solid, pour order 10): 110,102.673 108.673,102.673 108,102 108,88 110,88
GND on Bottom Layer "GND_L04_P019" (solid, pour order 19): 50,103 41,94 41,59 50,50 115,50 124,59 124,95 116,103

## Other copper
Bottom Layer:
  pour cut-out: 90,88 90,81 110,81 110,88

## Silkscreen, mask and mechanical layers (free items; w line width, h text height)
Top Overlay:
  drawing of 73 lines, arcs and shapes, not listed
Board:
  lines w0.5: 122.125,50.125 121,49 120,49 44,49 42.5,50.5 41.5,51.5 40,53 40,101 43,104 118,104 120,104 121,104 122,104 125,101 125,99 125,87.75 125,65.25 125,54 125,53 123.875,51.875 122.125,50.125 ; 122.125,50.125 122.125,50.125